# Altium PCB MT7688.PcbDoc (part 1 of 2)
Units mm, origin at the board's own origin, x right, y up, seen from the top; angles counter-clockwise.
Board outline 88.82 x 86.16 mm, 4 copper layers (Top Layer, GND, Layer 3, Bottom Layer), stack 0.603 mm thick; 138 components, 120 nets, 535 pads, 66 vias.
Unrouted connection lines stored in the file: 288.
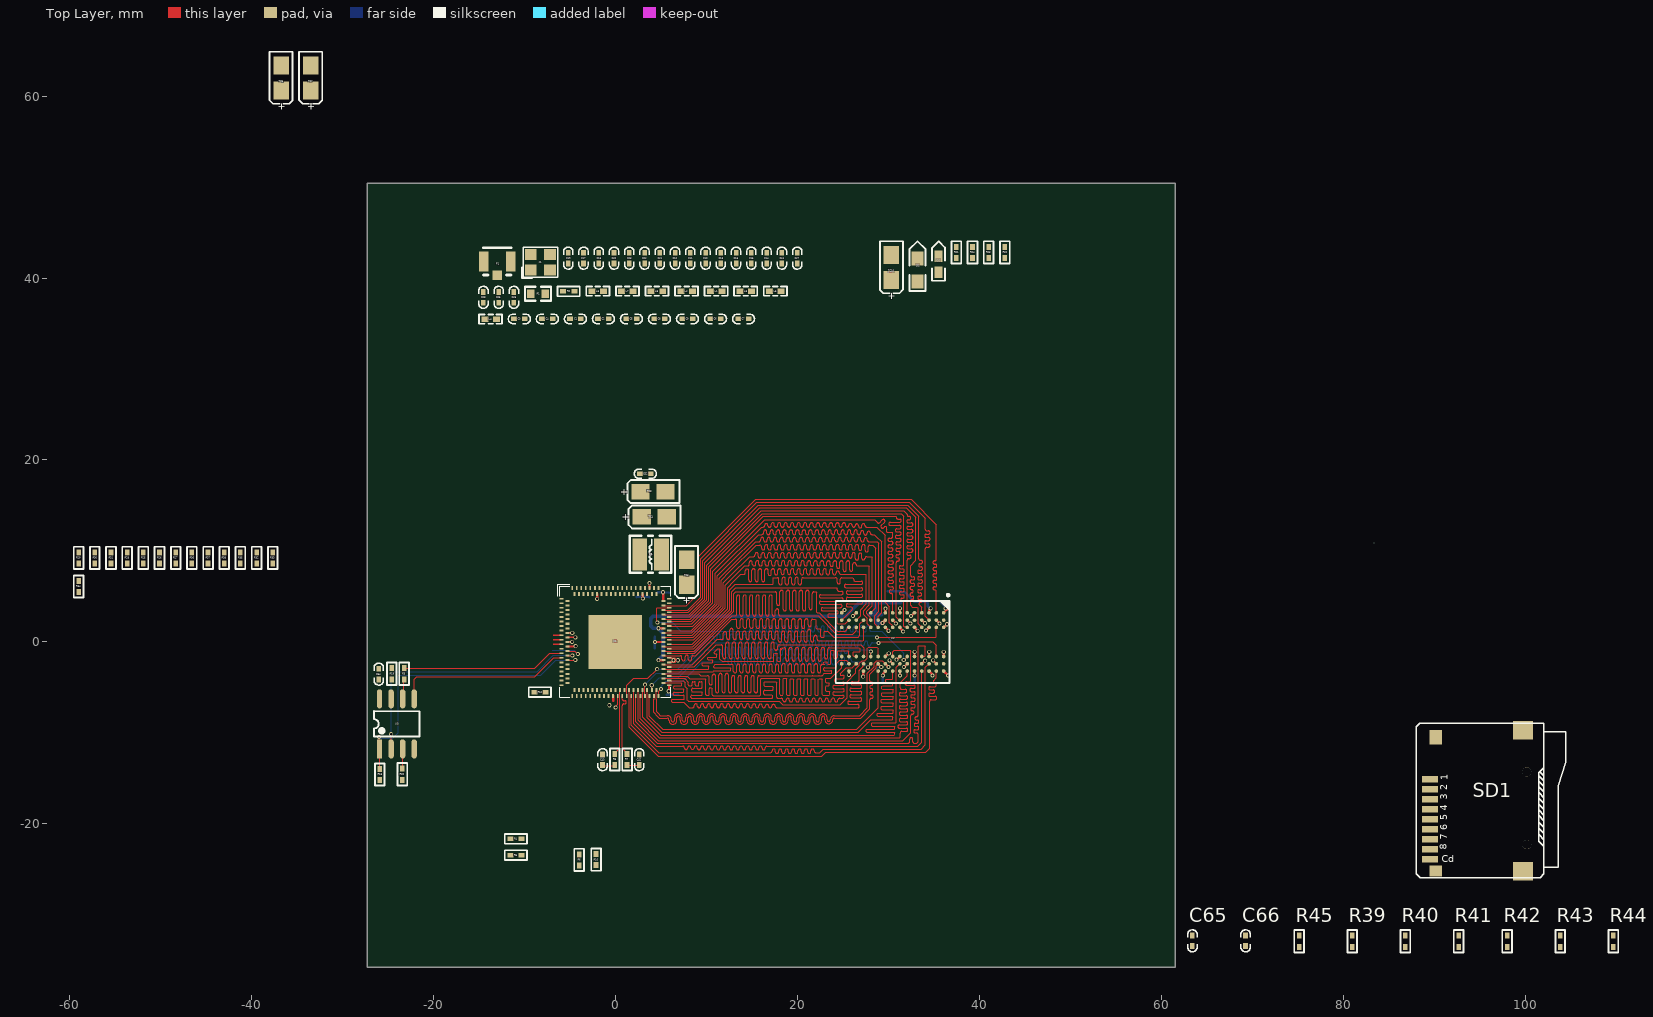
[diagram p0: Top Layer view]
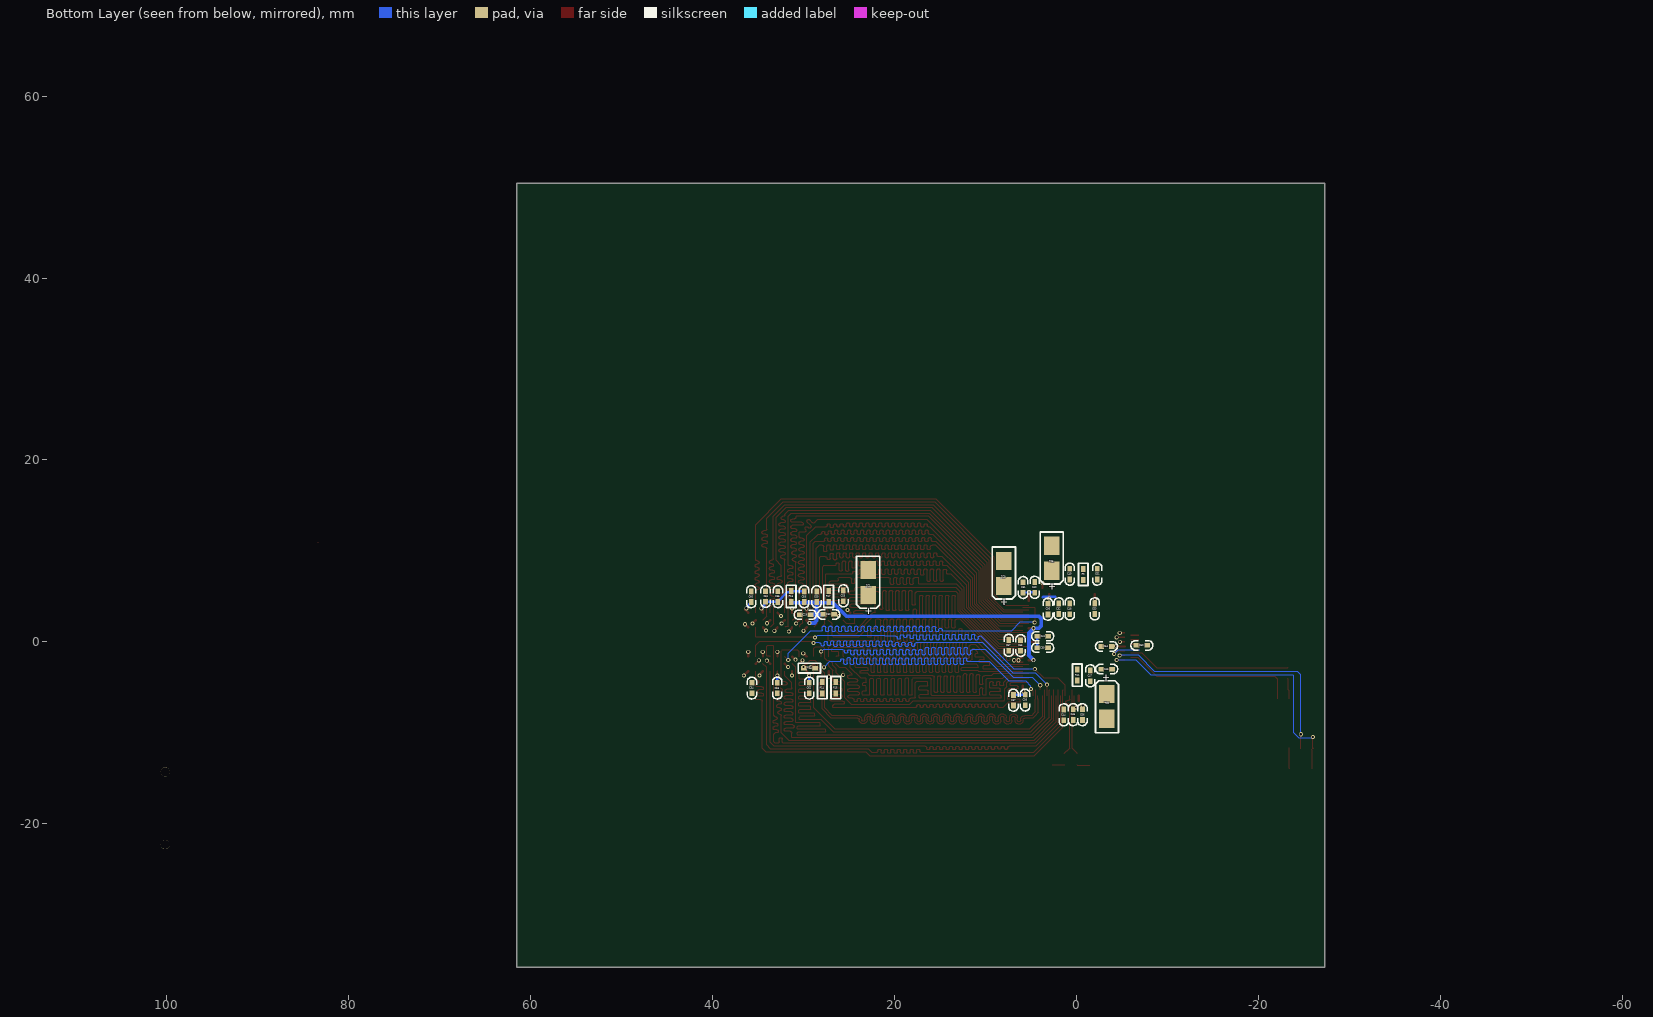
[diagram p1: Bottom Layer view, seen from below]
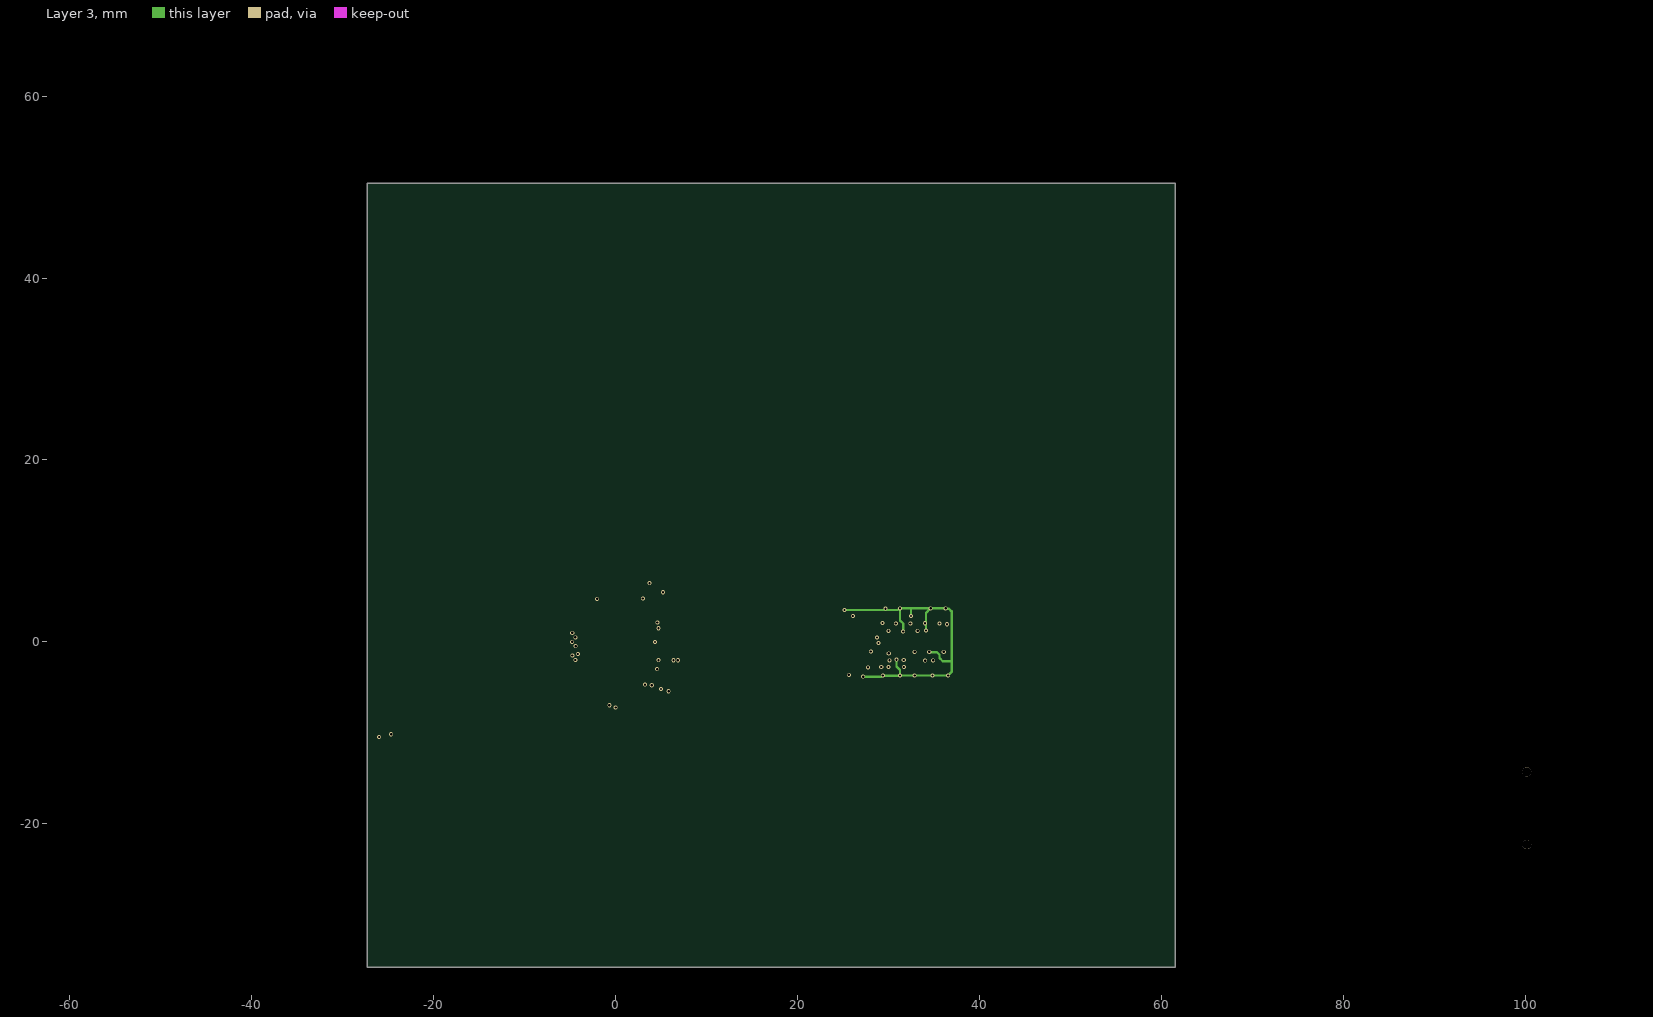
[diagram p2: Layer 3]

## Layer stack, top to bottom
Top Solder: solder mask 0.0102, Solder Resist, Dk 3.5
Top Layer: signal copper 0.0356
Dielectric 2: prepreg 0.0711, PP-006, Dk 4.1
GND: signal copper 0.035
Dielectric 1: dielectric 0.32, FR-4, Dk 4.8
Layer 3: signal copper 0.035
Power: prepreg 0.0711, PP-006, Dk 4.1
Bottom Layer: signal copper 0.0356
Bottom Solder: solder mask 0.0102, Solder Resist, Dk 3.5

## Board outline
-27.254,-35.747 -27.254,50.416 61.565,50.416 61.565,-35.747

## Design rules (kind name [scope] priority, off if disabled: settings)
Clearance DDR2 [InNetClass('DDR')] p1: gap=0.102 ignorepadtopadclearanceinfootprint=FALSE except(0.203: Arc-Arc Arc-Track Track-Track)
Clearance [All] p2: gap=0.152 ignorepadtopadclearanceinfootprint=FALSE except(0.102: Arc-SMDPad Track-SMDPad)
DiffPairsRouting [All] p1: maxlimit=0.406 minlimit=0.152 mostfreqgap=0.152 toplayer_minwidth=0.102 toplayer_maxwidth=0.203 toplayer_prefwidth=0.203 midlayer1_minwidth=0.102 midlayer1_maxwidth=0.203 midlayer1_prefwidth=0.203 midlayer2_minwidth=0.102 midlayer2_maxwidth=0.203 midlayer2_prefwidth=0.203 bottomlayer_minwidth=0.102 bottomlayer_maxwidth=0.203 bottomlayer_prefwidth=0.203 maxuncoupledlength=12.7
PolygonConnect [All] p1: connectstyle=Relief reliefconductorwidth=0.254 reliefentries=4 polygonreliefangle="90 Angle" airgapwidth=0.254
RoutingVias [All] p1: holewidth=0.25 width=0.45 viastyle="Through Hole" minholewidth=0.25 minwidth=0.45 maxholewidth=0.25 maxwidth=0.65
SilkToSolderMaskClearance [IsPad] p1: minsilkscreentomaskgap=0.025 clearancetoexposedcopper=TRUE
SolderMaskExpansion [IsVia] p1: expansion=0.102 istentingtop=TRUE
Width [All] p1: maxlimit=1 minlimit=0.102 preferedwidth=0.152
28 further rules are at their usual default settings.

## Classes and differential pairs
net class DDR: DDR_CASN DDR_CSN DDR_MBA0 DDR_MBA1 DDR_MBA2 DDR_MCKE DDR_MDQM0 DDR_MDQM1 DDR_MDQS0 DDR_MDQS1 DDR_MODT DDR_RASN DDR_VREF DDR_WEN MADDR0 MADDR1 MADDR2 MADDR3 MADDR4 MADDR5 MADDR6 MADDR7 MADDR8 MADDR9 MADDR10 MADDR11 MADDR12 MADDR13 MDATA0 MDATA1 MDATA2 MDATA3 MDATA4 MDATA5 MDATA6 MDATA7 MDATA8 MDATA9 MDATA10 MDATA11 MDATA12 MDATA13 MDATA14 MDATA15
component class Flash: C64 R18 R19 R20 U3
component class Designator: R25 R26 R27 R28 R29 R30 R31 R32 R33 R34 R35 R36 R37 R38
component class DDR: C58 C59 C60 C61 C62 C63 R13 R14 R15 R16 R17 TC9 U2
differential pair USB_D: +USB_D_P -USB_D_N
differential pair TXO1: +TXO1_P -TXO1_N
differential pair TXO0: +TXO0_P -TXO0_N
differential pair RXI1: +RXI1_P -RXI1_N
differential pair RXI0: +RXI0_P -RXI0_N
differential pair CLK: +CLK_P -CLK_N

## Components (designator, comment, footprint, x,y, rotation, side; value= is the part's Value field where it differs from the comment)
C1 "CAP" 0402C -5.025,35.502 r0 top
C2 "CAP" 0402C -1.946,35.502 r0 top
C3 "CAP" 0402C -11.184,35.502 r0 top
C4 "CAP" 0402C -8.105,35.502 r0 top
C5 "CAP" 0402C 1.134,35.502 r0 top
C6 "CAP" 0402C 10.373,35.502 r0 top
C7 "CAP" 0402C 13.452,35.502 r0 top
C8 "CAP" 0402C 4.213,35.502 r0 top
C9 "CAP" 0402C 7.293,35.502 r0 top
C10 "CAP" 0402C 9.92,41.558 r90 top
C11 "CAP" 0402C 8.243,41.558 r90 top
C12 "CAP" 0402C 6.566,41.558 r90 top
C13 "CAP" 0402C 11.596,41.558 r90 top
C14 "CAP" 0402C 16.626,41.558 r90 top
C15 "CAP" 0402C 14.95,41.558 r90 top
C16 "CAP" 0402C 13.273,41.558 r90 top
C17 "CAP" 0402C -3.494,41.558 r90 top
C18 "CAP" 0402C -1.817,41.558 r90 top
C19 "CAP" 0402C -5.171,41.558 r90 top
C20 "CAP" 0402C -0.141,41.558 r90 top
C21 "CAP" 0402C 4.889,41.558 r90 top
C22 "CAP" 0402C 3.213,41.558 r90 top
C23 "CAP" 0402C 1.536,41.558 r90 top
C24 "CAP" 0402C 18.303,41.558 r90 top
C25 "CAP" 0402C -12.825,37.246 r90 top
C26 "CAP" 0402C -11.149,37.246 r90 top
C27 "CAP" 0402C 19.98,41.558 r90 top
C28 "CAP" 0402C -14.502,37.246 r90 top
C29 "CAP" 0402C 29.2,2.99 r0 bottom
C30 "CAP" 0402C 27.888,3.021 r180 bottom
C31 "CAP" 0402C 5.885,5.349 r90 bottom
C32 "CAP" 0402C 1.958,4.284 r270 bottom
C33 "CAP" 0402C 25.632,4.423 r90 bottom
C34 "CAP" 0402C 35.691,-4.432 r270 bottom
C35 "CAP" 0402C 32.837,4.343 r90 bottom
C36 "CAP" 0402C 3.155,4.238 r270 bottom
C37 "CAP" 0402C 6.948,-5.77 r270 bottom
C38 "CAP" 0402C 5.672,-5.751 r270 bottom
C39 "CAP" 0402C 4.368,-0.645 r180 bottom
C40 "CAP" 0402C 4.611,5.368 r90 bottom
C41 "CAP" 0402C 4.364,0.639 r180 bottom
C42 "CAP" 0402C 2.614,-13.576 r90 top
C43 "CAP" 0402C -1.406,-13.58 r90 top
C44 "CAP" 0402C 1.409,-7.376 r270 bottom
C45 "CAP" 0402C 0.389,-7.356 r270 bottom
C46 "CAP" 0402C -3.936,-2.979 r0 bottom
C47 "CAP" 0402C -1.503,-4.368 r90 bottom
C48 "CAP" 0402C 0.757,4.267 r270 bottom
C49 "CAP" 0402C 0.753,6.817 r90 bottom
C50 "0.1uF/16V" 0402C -6.538,-0.379 r180 bottom
C51 "0.1uF/16V" 0402C -2.262,6.821 r90 bottom
C52 "0.1uF/16V" 0402C 2.659,18.491 r0 top
C53 "15pF/50V" 0402C -1.998,3.011 r90 bottom
C54 "15pF/50V" 0402C -3.914,-0.499 r0 bottom
C55 "0.1uF/16V" 0402C 6.161,-1.03 r90 bottom
C56 "0.1uF/16V" 0402C -0.635,-7.352 r270 bottom
C57 "0.1uF/16V" 0402C 7.46,-1.015 r90 bottom
C58 "0.1uF/16V" 0402C 29.956,5.607 r270 bottom
C59 "0.1uF/16V" 0402C 28.582,4.337 r90 bottom
C60 "0.1uF/16V" 0402C 35.778,4.337 r90 bottom
C61 "0.1uF/16V" 0402C 34.189,4.361 r90 bottom
C62 "0.1uF/16V" 0402C 29.39,-4.432 r270 bottom
C63 "0.1uF/16V" 0402C 32.921,-4.432 r270 bottom
C64 "0.1uF/16V" 0402C -26.001,-4.166 r90 top
C65 "10uF" 0402C 63.433,-33.485 r90 top
C66 "100nF" 0402C 69.273,-33.485 r90 top
D1 "LED" LED-0805B 33.211,39.602 r90 top
D2 "LED" LED-0603B 35.529,40.618 r90 top
L1 "INDUCTOR" 0402L 10.442,38.557 r0 top
L2 "INDUCTOR" 0402L 7.19,38.557 r0 top
L3 "INDUCTOR" 0402L 13.693,38.557 r0 top
L4 "INDUCTOR" 0402L -14.35,35.477 r0 top
L5 "INDUCTOR" 0402L 16.944,38.557 r0 top
L6 "INDUCTOR" 0402L -2.563,38.557 r0 top
L7 "INDUCTOR" 0402L 0.688,38.557 r0 top
L8 "INDUCTOR" 0402L 3.939,38.557 r0 top
L9 "INDUCTOR" CD31 3.872,9.624 r180 top
P1 "50OHM" IPEX -14.46,41.826 r0 top
R1 "RES" 0603R -9.294,38.277 r0 top
R2 "RES" 0402R -5.738,38.531 r0 top
R3 "RES" 0402R -23.224,-2.887 r270 top
R4 "RES" 0402R -11.542,-21.65 r0 top
R5 "RES" 0402R -11.542,-23.428 r0 top
R6 "RES" 0402R -3.979,-24.567 r90 top
R7 "RES" 0402R 1.281,-13.527 r90 top
R8 "RES" 0402R -0.065,-13.525 r90 top
R9 "RES" 0402R -0.735,8.035 r270 bottom
R10 "RES" 0402R -2.125,-24.544 r90 top
R11 "RES" 0402R -0.066,-3.04 r270 bottom
R12 "RES" 0402R -8.907,-5.518 r0 top
R13 "RES" 0402R 29.985,-2.871 r180 bottom
R14 "RES" 0402R 27.967,-5.642 r90 bottom
R15 "RES" 0402R 26.469,-4.423 r270 bottom
R16 "RES" 0402R 31.382,5.616 r270 bottom
R17 "RES" 0402R 27.258,4.397 r90 bottom
R18 "RES" 0402R -25.904,-15.175 r90 top
R19 "RES" 0402R -24.587,-2.887 r270 top
R20 "RES" 0402R -23.41,-13.933 r270 top
R21 "RES" 0402R 37.478,42.219 r90 top
R22 "RES" 0402R 42.812,42.219 r90 top
R23 "RES" 0402R 41.034,42.219 r90 top
R24 "RES" 0402R 39.256,42.219 r90 top
R25 "RES" 0402R -51.886,8.637 r90 top
R26 "RES" 0402R -50.108,8.637 r90 top
R27 "RES" 0402R -48.33,8.637 r90 top
R28 "RES" 0402R -53.664,8.637 r90 top
R29 "RES" 0402R -58.998,8.637 r90 top
R30 "RES" 0402R -57.22,8.637 r90 top
R31 "RES" 0402R -55.442,8.637 r90 top
R32 "RES" 0402R -39.44,8.637 r90 top
R33 "RES" 0402R -37.662,8.637 r90 top
R34 "RES" 0402R -58.998,5.488 r90 top
R35 "RES" 0402R -41.218,8.637 r90 top
R36 "RES" 0402R -46.552,8.637 r90 top
R37 "RES" 0402R -44.774,8.637 r90 top
R38 "RES" 0402R -42.996,8.637 r90 top
R39 "10K" 0402R 81.006,-33.51 r90 top
R40 "10K" 0402R 86.845,-33.51 r90 top
R41 "10K" 0402R 92.686,-33.51 r90 top
R42 "10K" 0402R 98.02,-33.51 r90 top
R43 "10K" 0402R 103.86,-33.51 r90 top
R44 "10K" 0402R 109.7,-33.51 r90 top
R45 "22R" 0402R 75.165,-33.51 r90 top
SD1 "MicroSD" "Micro SD" 99.778,-25.186 r90 top
TC1 "TCAP" TAJ-A/3216 22.911,5.1 r90 bottom
TC2 "TCAP" TAJ-A/3216 -3.327,-5.659 r270 bottom
TC3 "2.2uF/6.3V" TAJ-A/3216 7.822,6.243 r90 top
TC4 "10uF/6.3V" TAJ-A/3216 2.855,13.74 r0 top
TC5 "10uF/6.3V" TAJ-A/3216 2.734,7.783 r90 bottom
TC6 "2.2uF/6.3V" TAJ-A/3216 -36.745,60.553 r90 top
TC7 "4.7uF/6.3V" TAJ-A/3216 -33.497,60.553 r90 top
TC8 "4.7uF/6.3V" TAJ-A/3216 2.722,16.529 r0 top
TC9 "4.7uF/6.3V" TAJ-A/3216 8.004,6.107 r90 bottom
TC10 "4.7uF/6.3V" TAJ-A/3216 30.343,39.731 r90 top
U1 "MT7688AN" MT7628AN$2F$DRQFN156$2F$SMD$2F$P0.5$2F$12X12 0,0 r270 top locked
U2 "DDR2_W9751G6KB" MICT-RT-84 30.48,0 r270 top locked
U3 "W25Q128" SOP8 -25.926,-11.756 r90 top locked
X1 "XTAL-4P" "OSC 3225-4P" -8.243,41.752 r0 top

## Footprints (in the part's own frame and the unit in brackets; to place one, negate y for a bottom-side part, rotate by r counter-clockwise, add the part's x,y. Pads: shape width x height; smd on the part's side, far side on the other; paste and mask are expansions set on the pad)
0402C [mil]
  rect 25x20 smd: 1(2,0.16) 2(48,0.16)
  silkscreen extent -23,-20 73,20, body extent 5,-12 45,12, height 8
0402L [mil]
  rect 30x25 smd: 1(0,0) 2(50,0)
  silkscreen extent -25,-20 75,20, body extent 5,-10 45,10, height 20
0402R [mil]
  rect 26x20 smd: 1(0,0) 2(48,0)
  silkscreen extent -24,-21 72,21, body extent 4,-10 43,10, height 13
0603R [mm]
  rect 0.8x0.965 smd: 1(0,0) 2(1.6,0)
  silkscreen extent -0.64,-0.76 2.21,0.76, body extent -0.04,-0.41 1.56,0.41, height 0.45
CD31 [mm] "3.5*3*1mm（长宽高）"
  rect 1.6x3.5 smd: 1(-1.2,0) 2(1.2,0)
  silkscreen extent -2.29,-2.03 2.29,2.03, body extent -1.72,-1.48 1.72,1.52, height 1.2
IPEX [mm]
  rect 1.05x2.2 smd: 1(0,0) 3(2.95,0)
  rect 1x1.05 smd: 2(1.475,-1.525)
  silkscreen extent -0.02,-1.5 2.98,1.5, body extent 0.02,-1.55 3.02,1.55, height 1.25
LED-0603B [mil]
  rect 50x35 smd: A(0,0.26) K(70,0.26)
  silkscreen extent -36,-28 135,28, body extent 4,-15 66,17, height 24
LED-0805B [mil]
  rect 60x50 smd: A(0,0) K(100,0)
  silkscreen extent -40,-35 175,35, body extent 10,-25 89,25, height 32
"Micro SD" [mm]
  rect 2.032x2.2 smd: 0(0,0) 0(15.5,0)
  rect 1.2x1.4 smd: 0(0,9.6)
  round 1 hole 1 unplated: 0(2.9,-0.4) 0(10.9,-0.4)
  rect 1.6x1.4 smd: 0(14.7,9.6)
  rect 0.7x1.8 smd: 1(10.1,10.227) 2(9,10.227) 3(7.9,10.227) 4(6.8,10.227) 5(5.7,10.227) 6(4.6,10.227) 7(3.5,10.227) 8(2.4,10.227) 9(1.3,10.227)
  Top Layer lines w0.03: 36.064,16.423 36.114,16.373
  silkscreen extent -0.72,-4.68 16.27,11.75, body extent -0.27,-4.63 16,10.57, height 1.8
MICT-RT-84 [mm] "BGA, 84-Balls, Body 12.5x9mm, Pitch 0.8mm"
  round 0.4 smd: A1(-3.2,5.6) A2(-2.4,5.6) A3(-1.6,5.6) A7(1.6,5.6) A8(2.4,5.6) A9(3.2,5.6) B1(-3.2,4.8) B2(-2.4,4.8) B3(-1.6,4.8) B7(1.6,4.8) B8(2.4,4.8) B9(3.2,4.8) C1(-3.2,4) C2(-2.4,4) C3(-1.6,4) C7(1.6,4) C8(2.4,4) C9(3.2,4) D1(-3.2,3.2) D2(-2.4,3.2) D3(-1.6,3.2) D7(1.6,3.2) D8(2.4,3.2) D9(3.2,3.2) E1(-3.2,2.4) E2(-2.4,2.4) E3(-1.6,2.4) E7(1.6,2.4) E8(2.4,2.4) E9(3.2,2.4) F1(-3.2,1.6) F2(-2.4,1.6) F3(-1.6,1.6) F7(1.6,1.6) F8(2.4,1.6) F9(3.2,1.6) G1(-3.2,0.8) G2(-2.4,0.8) G3(-1.6,0.8) G7(1.6,0.8) G8(2.4,0.8) G9(3.2,0.8) H1(-3.2,0) H2(-2.4,0) H3(-1.6,0) H7(1.6,0) H8(2.4,0) H9(3.2,0) J1(-3.2,-0.8) J2(-2.4,-0.8) J3(-1.6,-0.8) J7(1.6,-0.8) J8(2.4,-0.8) J9(3.2,-0.8) K2(-2.4,-1.6) K3(-1.6,-1.6) K7(1.6,-1.6) K8(2.4,-1.6) K9(3.2,-1.6) L1(-3.2,-2.4) L2(-2.4,-2.4) L3(-1.6,-2.4) L7(1.6,-2.4) L8(2.4,-2.4) M2(-2.4,-3.2) M3(-1.6,-3.2) M7(1.6,-3.2) M8(2.4,-3.2) M9(3.2,-3.2) N1(-3.2,-4) N2(-2.4,-4) N3(-1.6,-4) N7(1.6,-4) N8(2.4,-4) P2(-2.4,-4.8) P3(-1.6,-4.8) P7(1.6,-4.8) P8(2.4,-4.8) P9(3.2,-4.8) R1(-3.2,-5.6) R2(-2.4,-5.6) R3(-1.6,-5.6) R7(1.6,-5.6) R8(2.4,-5.6)
  silkscreen extent -5.27,-6.25 4.5,6.25, body extent -4.5,-6.25 4.5,6.25, height 1.2
MT7628AN$2F$DRQFN156$2F$SMD$2F$P0.5$2F$12X12 [mm]
  rect 0.19x0.45 smd: 1(-4.75,-5.925) 3(-4.25,-5.925) 5(-3.75,-5.925) 7(-3.25,-5.925) 9(-2.75,-5.925) 11(-2.25,-5.925) 13(-1.75,-5.925) 15(-1.25,-5.925) 17(-0.75,-5.925) 19(-0.25,-5.925) 21(0.25,-5.925) 23(0.75,-5.925) 25(1.25,-5.925) 27(1.75,-5.925) 29(2.25,-5.925) 31(2.75,-5.925) 33(3.25,-5.925) 35(3.75,-5.925) 37(4.25,-5.925) 39(4.75,-5.925) 79(4.75,5.925) 81(4.25,5.925) 83(3.75,5.925) 85(3.25,5.925) 87(2.75,5.925) 89(2.25,5.925) 91(1.75,5.925) 93(1.25,5.925) 95(0.75,5.925) 97(0.25,5.925) 99(-0.25,5.925) 101(-0.75,5.925) 103(-1.25,5.925) 105(-1.75,5.925) 107(-2.25,5.925) 109(-2.75,5.925) 111(-3.25,5.925) 113(-3.75,5.925) 115(-4.25,5.925) 117(-4.75,5.925)
  rect 0.22x0.45 smd: 2(-4.5,-5.275) 4(-4,-5.275) 6(-3.5,-5.275) 8(-3,-5.275) 10(-2.5,-5.275) 12(-2,-5.275) 14(-1.5,-5.275) 16(-1,-5.275) 18(-0.5,-5.275) 20(0,-5.275) 22(0.5,-5.275) 24(1,-5.275) 26(1.5,-5.275) 28(2,-5.275) 30(2.5,-5.275) 32(3,-5.275) 34(3.5,-5.275) 36(4,-5.275) 38(4.5,-5.275) 80(4.5,5.275) 82(4,5.275) 84(3.5,5.275) 86(3,5.275) 88(2.5,5.275) 90(2,5.275) 92(1.5,5.275) 94(1,5.275) 96(0.5,5.275) 98(0,5.275) 100(-0.5,5.275) 102(-1,5.275) 104(-1.5,5.275) 106(-2,5.275) 108(-2.5,5.275) 110(-3,5.275) 112(-3.5,5.275) 114(-4,5.275) 116(-4.5,5.275)
  rect 0.45x0.19 smd: 40(5.925,-4.75) 42(5.925,-4.25) 44(5.925,-3.75) 46(5.925,-3.25) 48(5.925,-2.75) 50(5.925,-2.25) 52(5.925,-1.75) 54(5.925,-1.25) 56(5.925,-0.75) 58(5.925,-0.25) 60(5.925,0.25) 62(5.925,0.75) 64(5.925,1.25) 66(5.925,1.75) 68(5.925,2.25) 70(5.925,2.75) 72(5.925,3.25) 74(5.925,3.75) 76(5.925,4.25) 78(5.925,4.75) 118(-5.925,4.75) 120(-5.925,4.25) 122(-5.925,3.75) 124(-5.925,3.25) 126(-5.925,2.75) 128(-5.925,2.25) 130(-5.925,1.75) 132(-5.925,1.25) 134(-5.925,0.75) 136(-5.925,0.25) 138(-5.925,-0.25) 140(-5.925,-0.75) 142(-5.925,-1.25) 144(-5.925,-1.75) 146(-5.925,-2.25) 148(-5.925,-2.75) 150(-5.925,-3.25) 152(-5.925,-3.75) 154(-5.925,-4.25) 156(-5.925,-4.75)
  rect 0.45x0.22 smd: 41(5.275,-4.5) 43(5.275,-4) 45(5.275,-3.5) 47(5.275,-3) 49(5.275,-2.5) 51(5.275,-2) 53(5.275,-1.5) 55(5.275,-1) 57(5.275,-0.5) 59(5.275,0) 61(5.275,0.5) 63(5.275,1) 65(5.275,1.5) 67(5.275,2) 69(5.275,2.5) 71(5.275,3) 73(5.275,3.5) 75(5.275,4) 77(5.275,4.5) 119(-5.275,4.5) 121(-5.275,4) 123(-5.275,3.5) 125(-5.275,3) 127(-5.275,2.5) 129(-5.275,2) 131(-5.275,1.5) 133(-5.275,1) 135(-5.275,0.5) 137(-5.275,0) 139(-5.275,-0.5) 141(-5.275,-1) 143(-5.275,-1.5) 145(-5.275,-2) 147(-5.275,-2.5) 149(-5.275,-3) 151(-5.275,-3.5) 153(-5.275,-4) 155(-5.275,-4.5)
  rect 5.9x5.9 smd: 157(0,0)
  silkscreen extent -6.35,-6.35 6.1,6.1
"OSC 3225-4P" [mm]
  rect 1.3x1.2 smd: 1(-1.05,-0.85) 2(1.05,-0.85) 3(1.05,0.85) 4(-1.05,0.85)
  silkscreen extent -2.03,-1.75 1.9,1.65, body extent -1.47,-1.27 1.73,1.23, height 0.7
SOP8 [mm]
  rect 2.1x0.6 smd: 1(0,0)
  oval 2.1x0.6 smd: 2(0,-1.27) 3(0,-2.54) 4(0,-3.81) 5(5.5,-3.81) 6(5.5,-2.54) 7(5.5,-1.27) 8(5.5,0)
  silkscreen extent 1.35,-4.41 4.15,0.6, body extent -0.36,-4.37 5.64,0.63, height 1.9
TAJ-A/3216 [mm]
  rect 2x1.7 smd: 1(0.047,0) 2(2.794,0)
  silkscreen extent -1.4,-1.27 4.32,1.27, body extent -0.2,-0.8 3,0.8, height 1.6

## Part data
C1 C2 C3 C4 C5 C6 C7 C8 C9 C10 C11 C12 C13 C14 C15 C16 C17 C18 C19 C20 C21 C22 C23 C24 C25 C26 C27 C28 C29 C30 C31 C32 C33 C34 C35 C36 C37 C38 C39 C40 C41 C42 C43 C44 C45 C46 C47 C48 C49: "无极性电容"
C50 C51 C52 C53 C54 C55 C56 C57 C58 C59 C60 C61 C62 C63 C64 C65 C66: library part CAP, "无极性电容"
P1: library part IPEX, "RF Coaxial PCB Connector, MCX; Thru-Hole, Right-Angle Mount Socket, Blunt Post Terminal, 50 Ohm Impedance", PackageDocument=04-Jul-1999, ComponentLink1Description="Manufacturer Link", ComponentLink1URL=http://www.amphenolrf.com/, DatasheetDocument=30-May-2003, DrillSize="Corresponds to nominal value.", LatestRevisionDate=15-Jul-2004, LatestRevisionNote="Component Replaced.", PackageReference=919-119J-51AX, PCB_Layout="Complies with manufacturer's recommendation.", Published=15-Jul-2004, Publisher="Altium Limited"
R39 R40 R41 R42 R43 R44 R45: library part RES
TC1 TC2: "钽电容"
TC3 TC4 TC5 TC6 TC7 TC8 TC9 TC10: library part TCAP, "钽电容"
X1: "4脚无源晶振"

## Via types
v1: diameter 0.45, hole 0.25, Top Layer to Bottom Layer, tented both sides, 66 vias

## Nets (pads, with @x,y where several pads share a name; then routed paths per layer and width w, separated by ;. In a path a pad name is that pad's centre, name@x,y a point inside that pad or via, vN(x,y) a via of type N, cw(c..) or ccw(c..) an arc to the next point about the centre after c; other vN are vias at no path point)
3.3V_RF: C4.1 C5.2 C6.2 C7.2 C8.2 C9.2 C21.2 C22.2 C24.1 C25.1 C26.1 C27.1 L1.2 L2.2 R1.2 R2.1 U1.8 U1.14 U1.15 U1.149 U1.150 U1.155
3.3VD: C1.2 C2.2 C3.2 C44.1 C45.1 C46.1 C47.1 C49.1 C50.1 C51.1 C64.1 C65.1 C66.1 R1.1 R4.2 R5.2 R18.1 R19.1 R20.2 R21.1 R23.2 R24.2 R25.1 R27.1 R29.1 R30.1 R33.1 R35.1 R37.1 R39.1 R40.1 R41.1 R42.1 R43.1 R44.1 SD1.4 TC2.1 TC3.1 TC5.1 U1.23 U1.32 U1.38 U1.41 U1.53 U1.60 U1.117 U1.123 U1.124 U1.134 U1.146 U3.8 | length 1.4
  Top Layer w0.102: v1(0.033,-7.216) 0.033,-7.087 0.25,-6.87 U1.60@0.25,-5.925
CLK: R3.2 R27.2 R28.2 U3.6 | length 2.3
  Top Layer w0.102: U3.6@-23.386,-6.256 -23.386,-5.371 -23.255,-5.24 -23.255,-4.1 R3.2@-23.224,-4.069
CLK_N: R13.2 U1.76 U2.K8 | length 51.8
  Top Layer w0.102: U1.76@4.25,-5.925 4.25,-6.273 4.221,-6.301 4.221,-7.75 4.616,-8.144 4.833,-8.361 5.713,-8.361 cw(c5.713,-8.539) 5.89,-8.539 5.89,-8.604 ccw(c6.324,-8.604) 6.759,-8.604 6.759,-8.339 cw(c6.936,-8.339) 7.114,-8.339 7.114,-8.604 ccw(c7.548,-8.604) 7.982,-8.604 7.982,-8.339 cw(c8.16,-8.339) 8.338,-8.339 8.338,-8.604 ccw(c8.772,-8.604) 9.206,-8.604 9.206,-8.339 cw(c9.384,-8.339) 9.562,-8.339 9.562,-8.604 ccw(c9.996,-8.604) 10.43,-8.604 10.43,-8.339 cw(c10.608,-8.339) 10.786,-8.339 10.786,-8.604 ccw(c11.22,-8.604) 11.654,-8.604 11.654,-8.339 cw(c11.832,-8.339) 12.009,-8.339 12.009,-8.604 ccw(c12.443,-8.604) 12.878,-8.604 12.878,-8.339 cw(c13.055,-8.339) 13.233,-8.339 13.233,-8.604 ccw(c13.667,-8.604) 14.101,-8.604 14.101,-8.339 cw(c14.279,-8.339) 14.457,-8.339 14.457,-8.604 ccw(c14.891,-8.604) 15.325,-8.604 15.325,-8.339 cw(c15.503,-8.339) 15.681,-8.339 15.681,-8.604 ccw(c16.115,-8.604) 16.549,-8.604 16.549,-8.339 cw(c16.727,-8.339) 16.905,-8.339 16.905,-8.604 ccw(c17.339,-8.604) 17.773,-8.604 17.773,-8.339 cw(c17.951,-8.339) 18.128,-8.339 18.128,-8.604 ccw(c18.562,-8.604) 18.997,-8.604 18.997,-8.339 cw(c19.174,-8.339) 19.352,-8.339 19.352,-8.604 ccw(c19.786,-8.604) 20.22,-8.604 20.22,-8.339 cw(c20.398,-8.339) 20.576,-8.339 20.576,-8.604 ccw(c21.01,-8.604) 21.444,-8.604 21.444,-8.339 cw(c21.622,-8.339) 21.8,-8.339 21.8,-8.604 ccw(c22.234,-8.604) 22.668,-8.604 22.668,-8.339 cw(c22.846,-8.339) 23.024,-8.339 23.024,-8.553 ccw(c23.458,-8.553) 23.892,-8.553 23.892,-8.539 cw(c24.07,-8.539) 24.07,-8.361 26.246,-8.361 26.478,-8.361 26.963,-8.361 27.96,-7.364 27.96,-6.785 27.96,-6.379 cw(c28.138,-6.379) 28.138,-6.201 28.161,-6.201 ccw(c28.161,-6.023) 28.161,-5.846 28.136,-5.846 cw(c28.136,-5.668) 28.136,-5.49 ccw(c28.136,-5.312) 28.136,-5.134 cw(c28.136,-4.957) 28.136,-4.779 28.138,-4.779 ccw(c28.138,-4.601) 28.138,-4.423 cw(c28.138,-4.245) 27.96,-4.245 27.96,-3.553 28.235,-3.278 28.689,-2.824 28.689,-2.609 28.88,-2.417 U2.K8@28.88,-2.4
  Top Layer w0.254: U2.K8@28.88,-2.417 v1(29.225,-2.763)
  Bottom Layer w0.102: R13.2@28.765,-2.871 28.874,-2.763 v1(29.225,-2.763)
CLK_P: R13.1 U1.77 U2.J8 | length 51.3
  Top Layer w0.102: U1.77@4.5,-5.275 4.5,-6.273 4.526,-6.299 4.526,-7.692 4.688,-7.854 4.939,-8.105 5.713,-8.105 cw(c5.713,-8.539) 6.147,-8.539 6.147,-8.604 ccw(c6.324,-8.604) 6.502,-8.604 6.502,-8.339 cw(c6.936,-8.339) 7.37,-8.339 7.37,-8.604 ccw(c7.548,-8.604) 7.726,-8.604 7.726,-8.339 cw(c8.16,-8.339) 8.594,-8.339 8.594,-8.604 ccw(c8.772,-8.604) 8.95,-8.604 8.95,-8.339 cw(c9.384,-8.339) 9.818,-8.339 9.818,-8.604 ccw(c9.996,-8.604) 10.174,-8.604 10.174,-8.339 cw(c10.608,-8.339) 11.042,-8.339 11.042,-8.604 ccw(c11.22,-8.604) 11.397,-8.604 11.397,-8.339 cw(c11.832,-8.339) 12.266,-8.339 12.266,-8.604 ccw(c12.443,-8.604) 12.621,-8.604 12.621,-8.339 cw(c13.055,-8.339) 13.489,-8.339 13.489,-8.604 ccw(c13.667,-8.604) 13.845,-8.604 13.845,-8.339 cw(c14.279,-8.339) 14.713,-8.339 14.713,-8.604 ccw(c14.891,-8.604) 15.069,-8.604 15.069,-8.339 cw(c15.503,-8.339) 15.937,-8.339 15.937,-8.604 ccw(c16.115,-8.604) 16.293,-8.604 16.293,-8.339 cw(c16.727,-8.339) 17.161,-8.339 17.161,-8.604 ccw(c17.339,-8.604) 17.516,-8.604 17.516,-8.339 cw(c17.951,-8.339) 18.385,-8.339 18.385,-8.604 ccw(c18.562,-8.604) 18.74,-8.604 18.74,-8.339 cw(c19.174,-8.339) 19.608,-8.339 19.608,-8.604 ccw(c19.786,-8.604) 19.964,-8.604 19.964,-8.339 cw(c20.398,-8.339) 20.832,-8.339 20.832,-8.604 ccw(c21.01,-8.604) 21.188,-8.604 21.188,-8.339 cw(c21.622,-8.339) 22.056,-8.339 22.056,-8.604 ccw(c22.234,-8.604) 22.412,-8.604 22.412,-8.339 cw(c22.846,-8.339) 23.28,-8.339 23.28,-8.553 ccw(c23.458,-8.553) 23.635,-8.553 23.635,-8.539 cw(c24.07,-8.539) 24.07,-8.105 26.246,-8.105 26.478,-8.105 26.857,-8.105 27.704,-7.258 27.704,-3.447 28.432,-2.718 28.432,-2.349 28.734,-2.048 29.328,-2.048 U2.J8@29.68,-2.4
  Top Layer w0.254: U2.J8@29.68,-2.4 v1(30.025,-2.745)
CPURST_N: R22.2 U1.138
CS0: R18.2 U1.28 U3.1 | length 33.5
  Top Layer w0.102: v1(-25.961,-10.447) -25.961,-10.461 v1@-25.938,-10.484 ; v1@-25.938,-10.461 v1@-25.938,-10.314 ; U3.1@-25.926,-11.756 U3.1@-25.938,-11.743 ; v1@-25.916,-10.461 v1@-25.938,-10.484 ; R18.2@-25.904,-13.956 -25.904,-11.882 U3.1@-25.866,-11.844 ; U1.28@-5.275,-2 -5.273,-1.998 -4.406,-1.998 v1(-4.403,-1.995) ; U3.1@-25.938,-11.743 -25.994,-11.688 U3.1@-25.938,-11.632 ; U3.1@-25.938,-11.743 U3.1@-25.938,-11.632 ; U3.1@-25.938,-11.632 v1@-25.938,-10.484
  Bottom Layer w0.102: v1(-25.961,-10.447) -25.831,-10.577 -24.471,-10.577 -23.886,-9.992 -23.886,-3.711 -23.827,-3.651 -8.202,-3.651 -6.546,-1.995 v1(-4.403,-1.995)
DDR_1V8: C31.1 C32.1 C33.1 C34.1 C35.1 C36.1 C37.1 C38.1 C39.1 C40.1 C41.1 C58.1 C60.1 C61.1 C62.1 C63.1 R14.1 R16.1 TC1.1 TC6.1 TC7.1 TC9.1 U1.79 U1.98 U1.116 U1.125 U2.A1 U2.A9 U2.C1 U2.C3 U2.C7 U2.C9 U2.E1 U2.E9 U2.G1 U2.G3 U2.G7 U2.G9 U2.J1 U2.J9 U2.M9 U2.R1 | length 64.2
  Top Layer w0.152: U2.E9@32.88,-3.2 32.891,-3.211 v1@32.891,-3.757
  Top Layer w0.254: U1.125@3,5.275 3.017,5.258 3.017,4.776 v1(3.018,4.775) ; v1(4.354,-0.006) 4.36,0 U1.98@5.275,0 ; v1@5.221,5.427 5.249,5.399 5.249,4.517 5.266,4.5 U1.116@5.275,4.5 ; v1(5.857,-5.42) 5.857,-5.367 5.931,-5.293 U1.79@5.931,-4.782 ; U2.R1@24.88,3.2 v1(25.184,3.504) ; v1@27.259,-3.83 27.259,-3.221 U2.M9@27.28,-3.2 ; v1@29.443,-3.476 29.68,-3.24 U2.J9@29.68,-3.2 ; U2.J1@29.681,3.201 v1(29.681,3.655) ; v1@30.935,-1.945 U2.G7@31.28,-1.6 ; v1(31.28,-3.688) U2.G9@31.28,-3.2 ; U2.G3@31.28,1.6 31.28,1.56 31.353,1.487 31.353,1.473 31.637,1.189 v1(31.637,1.141) ; U2.G1@31.28,3.2 31.282,3.202 31.282,3.691 v1(31.284,3.693) ; v1@32.535,2.855 U2.E1@32.88,3.2 ; v1(34.135,1.255) U2.C3@34.48,1.6 ; U2.C9@34.48,-3.2 34.819,-3.539 34.819,-3.662 v1(34.856,-3.699) ; U2.C7@34.48,-1.6 v1@34.48,-1.112 ; U2.C1@34.48,3.2 34.508,3.228 34.508,3.494 ; U2.A9@36.08,-3.2 v1@36.584,-3.704 ; U2.A1@36.08,3.2 v1@36.425,3.545
  Layer 3 w0.254: v1(25.184,3.504) 31.042,3.504 31.231,3.693 v1(31.284,3.693) ; v1(27.239,-3.818) v1@29.223,-3.818 ; v1@29.419,-3.702 31.267,-3.702 v1(31.28,-3.688) ; v1(30.905,-1.945) 30.905,-2.702 31.28,-3.077 v1(31.28,-3.688) ; v1(31.637,1.141) 31.637,2.019 31.284,2.372 v1(31.284,3.693) ; v1(32.505,2.855) 32.505,3.618 32.581,3.693 ; v1(34.135,1.255) 34.135,3.174 v1(34.654,3.693) ; v1(34.501,-1.091) 34.534,-1.124 35.344,-1.124 35.623,-1.402 35.623,-1.765 35.986,-2.129 36.908,-2.129 36.959,-2.078 ; v1(31.28,-3.688) v1(32.902,-3.688) 32.905,-3.686 36.581,-3.686 v1(36.584,-3.688) 36.959,-3.313 36.959,-2.078 ; v1(31.284,3.693) 32.581,3.693 ; 32.581,3.693 v1(34.654,3.693) ; v1(34.654,3.693) v1(36.307,3.693) 36.344,3.656 36.664,3.656 36.959,3.361 36.959,-2.078
  Bottom Layer w0.254: 2.315,4.928 2.339,4.951 2.955,4.951 2.956,4.952 3.673,4.952 3.71,4.916 ; C39.1@4.337,-0.711 4.335,-0.709 4.335,-0.025 v1(4.354,-0.006) 4.333,0.015 4.333,0.551 C41.1@4.366,0.584 ; C40.1@4.615,5.419 4.654,5.458 v1(5.238,5.458) ; v1@5.207,5.437 5.215,5.429 5.86,5.429 C31.1@5.889,5.4 ; C38.1@5.646,-5.814 5.65,-5.811 6.935,-5.811 C37.1@6.944,-5.82 ; C62.1@29.387,-4.413 29.396,-4.404 29.396,-3.698 v1(29.406,-3.688) ; C58.1@29.953,5.556 29.983,5.586 31.351,5.586 R16.1@31.382,5.616 ; R16.1@31.431,5.491 31.463,5.459 31.839,5.459 32.841,4.458 C35.1@32.841,4.394 ; C35.1@32.852,4.403 34.185,4.403 C61.1@34.193,4.412 34.32,4.285 34.32,3.94 34.53,3.731 34.616,3.731 v1(34.654,3.693) ; v1(32.902,-3.688) 32.91,-3.696 32.91,-4.406 C63.1@32.917,-4.413 ; C60.1@35.782,4.388 35.782,4.324 36.269,3.837 36.269,3.731 v1(36.307,3.693)
DDR_CASN: U1.75 U2.L7 | length 48.7
  Top Layer w0.102: v1(3.999,-4.765) 4,-4.766 U1.75@4,-5.275 ; U2.L7@28.08,-1.6 U2.L7@28.08,-1.6 28.082,-1.091 v1@28.092,-1.081
  Bottom Layer w0.102: v1(3.999,-4.765) 4.807,-3.957 6.899,-3.957 10.01,-0.846 11.064,-0.846 11.47,-0.846 cw(c11.47,-1.024) 11.648,-1.024 11.648,-1.265 ccw(c11.826,-1.265) 12.004,-1.265 12.004,-0.738 cw(c12.181,-0.738) 12.359,-0.738 12.359,-1.265 ccw(c12.537,-1.265) 12.715,-1.265 12.715,-0.738 cw(c12.893,-0.738) 13.07,-0.738 13.07,-1.265 ccw(c13.248,-1.265) 13.426,-1.265 13.426,-0.738 cw(c13.604,-0.738) 13.782,-0.738 13.782,-1.265 ccw(c13.959,-1.265) 14.137,-1.265 14.137,-0.738 cw(c14.315,-0.738) 14.493,-0.738 14.493,-1.265 ccw(c14.671,-1.265) 14.848,-1.265 14.848,-0.738 cw(c15.026,-0.738) 15.204,-0.738 15.204,-1.265 ccw(c15.382,-1.265) 15.56,-1.265 15.56,-0.738 cw(c15.737,-0.738) 15.915,-0.738 15.915,-1.265 ccw(c16.093,-1.265) 16.271,-1.265 16.271,-0.738 cw(c16.449,-0.738) 16.626,-0.738 16.626,-1.265 ccw(c16.804,-1.265) 16.982,-1.265 16.982,-0.989 cw(c17.16,-0.989) 17.338,-0.989 17.338,-1.265 ccw(c17.515,-1.265) 17.693,-1.265 17.693,-0.989 cw(c17.871,-0.989) 18.049,-0.989 18.049,-1.265 ccw(c18.227,-1.265) 18.404,-1.265 18.404,-0.989 cw(c18.582,-0.989) 18.76,-0.989 18.76,-1.265 ccw(c18.938,-1.265) 19.116,-1.265 19.116,-0.989 cw(c19.293,-0.989) 19.471,-0.989 19.471,-1.265 ccw(c19.649,-1.265) 19.827,-1.265 19.827,-0.989 cw(c20.005,-0.989) 20.182,-0.989 20.182,-1.265 ccw(c20.36,-1.265) 20.538,-1.265 20.538,-0.989 cw(c20.716,-0.989) 20.894,-0.989 20.894,-1.265 ccw(c21.071,-1.265) 21.249,-1.265 21.249,-0.989 cw(c21.427,-0.989) 21.605,-0.989 21.605,-1.265 ccw(c21.783,-1.265) 21.96,-1.265 21.96,-1.024 cw(c22.138,-1.024) 22.316,-1.024 22.316,-1.265 ccw(c22.494,-1.265) 22.672,-1.265 22.672,-1.024 cw(c22.849,-1.024) 23.027,-1.024 23.027,-1.265 ccw(c23.205,-1.265) 23.383,-1.265 23.383,-1.024 cw(c23.561,-1.024) 23.738,-1.024 23.738,-1.265 ccw(c23.916,-1.265) 24.094,-1.265 24.094,-1.024 cw(c24.272,-1.024) 24.45,-1.024 24.45,-1.265 ccw(c24.627,-1.265) 24.805,-1.265 24.805,-1.024 cw(c24.983,-1.024) 25.161,-1.024 25.161,-1.079 ccw(c25.339,-1.079) 25.516,-1.079 25.516,-1.024 cw(c25.694,-1.024) 25.694,-0.846 27.85,-0.846 27.979,-0.975 28.064,-1.06 v1(28.084,-1.06)
DDR_CSN: U1.78 U2.L8 | length 49.6
  Top Layer w0.102: U1.78@4.75,-5.925 4.75,-5.425 v1(5.005,-5.169) ; v1(27.777,-2.791) 27.777,-2.703 U2.L8@28.08,-2.4
  Bottom Layer w0.102: v1(5.005,-5.169) 5.024,-5.151 5.024,-4.858 5.54,-4.342 7.393,-4.342 9.549,-2.186 11.839,-2.186 11.889,-2.186 ccw(c11.889,-2.008) 12.067,-2.008 12.067,-1.922 cw(c12.245,-1.922) 12.423,-1.922 12.423,-2.336 ccw(c12.601,-2.336) 12.778,-2.336 12.778,-1.922 cw(c12.956,-1.922) 13.134,-1.922 13.134,-2.336 ccw(c13.312,-2.336) 13.49,-2.336 13.49,-1.923 cw(c13.667,-1.923) 13.845,-1.923 13.845,-2.336 ccw(c14.023,-2.336) 14.201,-2.336 14.201,-1.923 cw(c14.379,-1.923) 14.556,-1.923 14.556,-2.336 ccw(c14.734,-2.336) 14.912,-2.336 14.912,-1.923 cw(c15.09,-1.923) 15.268,-1.923 15.268,-2.336 ccw(c15.445,-2.336) 15.623,-2.336 15.623,-1.923 cw(c15.801,-1.923) 15.979,-1.923 15.979,-2.336 ccw(c16.157,-2.336) 16.334,-2.336 16.334,-1.923 cw(c16.512,-1.923) 16.69,-1.923 16.69,-2.336 ccw(c16.868,-2.336) 17.046,-2.336 17.046,-1.923 cw(c17.223,-1.923) 17.401,-1.923 17.401,-2.336 ccw(c17.579,-2.336) 17.757,-2.336 17.757,-1.923 cw(c17.935,-1.923) 18.112,-1.923 18.112,-2.336 ccw(c18.29,-2.336) 18.468,-2.336 18.468,-1.923 cw(c18.646,-1.923) 18.824,-1.923 18.824,-2.336 ccw(c19.001,-2.336) 19.179,-2.336 19.179,-1.923 cw(c19.357,-1.923) 19.535,-1.923 19.535,-2.336 ccw(c19.713,-2.336) 19.89,-2.336 19.89,-1.923 cw(c20.068,-1.923) 20.246,-1.923 20.246,-2.336 ccw(c20.424,-2.336) 20.602,-2.336 20.602,-1.923 cw(c20.779,-1.923) 20.957,-1.923 20.957,-2.336 ccw(c21.135,-2.336) 21.313,-2.336 21.313,-1.923 cw(c21.491,-1.923) 21.668,-1.923 21.668,-2.336 ccw(c21.846,-2.336) 22.024,-2.336 22.024,-1.923 cw(c22.202,-1.923) 22.38,-1.923 22.38,-2.336 ccw(c22.557,-2.336) 22.735,-2.336 22.735,-1.923 cw(c22.913,-1.923) 23.091,-1.923 23.091,-2.336 ccw(c23.269,-2.336) 23.446,-2.336 23.446,-1.923 cw(c23.624,-1.923) 23.802,-1.923 23.802,-2.336 ccw(c23.98,-2.336) 24.158,-2.336 24.158,-1.923 cw(c24.335,-1.923) 24.513,-1.923 24.513,-2.336 ccw(c24.691,-2.336) 24.869,-2.336 24.869,-1.875 cw(c25.047,-1.875) 25.224,-1.875 25.224,-2.312 ccw(c25.402,-2.312) 25.58,-2.312 25.58,-2.008 cw(c25.758,-2.008) 25.936,-2.008 ccw(c26.113,-2.008) 26.113,-2.186 26.517,-2.186 27.171,-2.186 v1@27.763,-2.777
DDR_MBA0: U1.100 U2.L2 | length 50.8
  Top Layer w0.102: U1.100@5.275,0.5 6.736,0.5 8.535,0.5 11.874,3.839 11.874,6.494 12.701,7.32 14.764,9.383 15.121,9.383 15.171,9.383 ccw(c15.171,9.561) 15.349,9.561 15.349,9.629 cw(c15.527,9.629) 15.705,9.629 15.705,9.403 ccw(c15.883,9.403) 16.06,9.403 16.06,9.629 cw(c16.238,9.629) 16.416,9.629 16.416,9.403 ccw(c16.594,9.403) 16.772,9.403 16.772,9.629 cw(c16.949,9.629) 17.127,9.629 17.127,9.403 ccw(c17.305,9.403) 17.483,9.403 17.483,9.629 cw(c17.661,9.629) 17.838,9.629 17.838,9.403 ccw(c18.016,9.403) 18.194,9.403 18.194,9.629 cw(c18.372,9.629) 18.55,9.629 18.55,9.403 ccw(c18.727,9.403) 18.905,9.403 18.905,9.629 cw(c19.083,9.629) 19.261,9.629 19.261,9.403 ccw(c19.439,9.403) 19.616,9.403 19.616,9.629 cw(c19.794,9.629) 19.972,9.629 19.972,9.403 ccw(c20.15,9.403) 20.328,9.403 20.328,9.629 cw(c20.505,9.629) 20.683,9.629 20.683,9.403 ccw(c20.861,9.403) 21.039,9.403 21.039,9.629 cw(c21.217,9.629) 21.394,9.629 21.394,9.403 ccw(c21.572,9.403) 21.75,9.403 21.75,9.629 cw(c21.928,9.629) 22.106,9.629 22.106,9.403 ccw(c22.283,9.403) 22.461,9.403 22.461,9.629 cw(c22.639,9.629) 22.817,9.629 22.817,9.402 ccw(c22.995,9.402) 23.172,9.402 23.172,9.629 cw(c23.35,9.629) 23.528,9.629 23.528,9.401 ccw(c23.706,9.401) 23.884,9.401 23.884,9.629 cw(c24.061,9.629) 24.239,9.629 24.239,9.4 ccw(c24.417,9.4) 24.595,9.4 24.595,9.629 cw(c24.773,9.629) 24.95,9.629 24.95,9.399 ccw(c25.128,9.399) 25.306,9.399 25.306,9.629 cw(c25.484,9.629) 25.662,9.629 25.662,9.398 ccw(c25.839,9.398) 26.017,9.398 26.017,9.629 cw(c26.195,9.629) 26.373,9.629 26.373,9.183 ccw(c26.551,9.183) 26.728,9.183 26.728,9.59 cw(c26.906,9.59) 27.084,9.59 27.084,9.205 ccw(c27.262,9.205) 27.44,9.205 cw(c27.617,9.205) 27.617,9.383 28.104,9.383 28.177,9.383 28.237,9.323 28.237,3.978 27.631,3.373 27.631,3.11 28.031,2.711 28.031,2.449 U2.L2@28.08,2.4
DDR_MBA1: U1.99 U2.L3 | length 50.9
  Top Layer w0.102: U1.99@5.828,0.255 8.614,0.255 12.103,3.745 12.103,6.247 12.868,7.012 14.207,8.352 14.489,8.352 14.54,8.352 ccw(c14.54,8.529) 14.718,8.529 14.718,8.728 cw(c14.896,8.728) 15.073,8.728 15.073,8.529 ccw(c15.251,8.529) 15.429,8.529 15.429,8.743 cw(c15.607,8.743) 15.785,8.743 15.785,8.529 ccw(c15.962,8.529) 16.14,8.529 16.14,8.743 cw(c16.318,8.743) 16.496,8.743 16.496,8.529 ccw(c16.674,8.529) 16.851,8.529 16.851,8.743 cw(c17.029,8.743) 17.207,8.743 17.207,8.529 ccw(c17.385,8.529) 17.563,8.529 17.563,8.743 cw(c17.74,8.743) 17.918,8.743 17.918,8.529 ccw(c18.096,8.529) 18.274,8.529 18.274,8.743 cw(c18.452,8.743) 18.629,8.743 18.629,8.529 ccw(c18.807,8.529) 18.985,8.529 18.985,8.743 cw(c19.163,8.743) 19.341,8.743 19.341,8.529 ccw(c19.518,8.529) 19.696,8.529 19.696,8.743 cw(c19.874,8.743) 20.052,8.743 20.052,8.529 ccw(c20.23,8.529) 20.407,8.529 20.407,8.743 cw(c20.585,8.743) 20.763,8.743 20.763,8.529 ccw(c20.941,8.529) 21.119,8.529 21.119,8.743 cw(c21.296,8.743) 21.474,8.743 21.474,8.529 ccw(c21.652,8.529) 21.83,8.529 21.83,8.743 cw(c22.008,8.743) 22.185,8.743 22.185,8.529 ccw(c22.363,8.529) 22.541,8.529 22.541,8.743 cw(c22.719,8.743) 22.897,8.743 22.897,8.529 ccw(c23.074,8.529) 23.252,8.529 23.252,8.743 cw(c23.43,8.743) 23.608,8.743 23.608,8.496 ccw(c23.786,8.496) 23.963,8.496 23.963,8.743 cw(c24.141,8.743) 24.319,8.743 24.319,8.276 ccw(c24.497,8.276) 24.675,8.276 24.675,8.743 cw(c24.852,8.743) 25.03,8.743 25.03,7.92 ccw(c25.208,7.92) 25.386,7.92 25.386,8.743 cw(c25.564,8.743) 25.741,8.743 25.741,7.95 ccw(c25.919,7.95) 26.097,7.95 26.097,8.529 cw(c26.275,8.529) 26.453,8.529 ccw(c26.63,8.529) 26.63,8.352 27.511,8.352 27.865,8.352 27.925,8.292 27.925,4.098 27.278,3.452 27.278,3.016 27.695,2.6 27.695,1.985 U2.L3@28.08,1.6
DDR_MBA2: U1.101 U2.L1 | length 50.8
  Top Layer w0.102: U1.101@5.925,0.75 5.928,0.747 8.458,0.747 11.646,3.934 11.646,6.791 12.6,7.744 15.481,10.626 15.497,10.641 15.888,10.641 cw(c15.888,10.464) 16.066,10.464 16.066,10.289 ccw(c16.243,10.289) 16.421,10.289 16.421,10.503 cw(c16.599,10.503) 16.777,10.503 16.777,10.289 ccw(c16.955,10.289) 17.132,10.289 17.132,10.503 cw(c17.31,10.503) 17.488,10.503 17.488,10.289 ccw(c17.666,10.289) 17.844,10.289 17.844,10.503 cw(c18.021,10.503) 18.199,10.503 18.199,10.289 ccw(c18.377,10.289) 18.555,10.289 18.555,10.503 cw(c18.733,10.503) 18.91,10.503 18.91,10.289 ccw(c19.088,10.289) 19.266,10.289 19.266,10.503 cw(c19.444,10.503) 19.622,10.503 19.622,10.289 ccw(c19.799,10.289) 19.977,10.289 19.977,10.503 cw(c20.155,10.503) 20.333,10.503 20.333,10.289 ccw(c20.511,10.289) 20.688,10.289 20.688,10.503 cw(c20.866,10.503) 21.044,10.503 21.044,10.289 ccw(c21.222,10.289) 21.4,10.289 21.4,10.503 cw(c21.577,10.503) 21.755,10.503 21.755,10.289 ccw(c21.933,10.289) 22.111,10.289 22.111,10.503 cw(c22.289,10.503) 22.466,10.503 22.466,10.289 ccw(c22.644,10.289) 22.822,10.289 22.822,10.508 cw(c23,10.508) 23.178,10.508 23.178,10.289 ccw(c23.355,10.289) 23.533,10.289 23.533,10.508 cw(c23.711,10.508) 23.889,10.508 23.889,10.289 ccw(c24.067,10.289) 24.244,10.289 24.244,10.526 cw(c24.422,10.526) 24.6,10.526 24.6,10.289 ccw(c24.778,10.289) 24.956,10.289 24.956,10.526 cw(c25.133,10.526) 25.311,10.526 25.311,10.289 ccw(c25.489,10.289) 25.667,10.289 25.667,10.526 cw(c25.845,10.526) 26.022,10.526 26.022,10.289 ccw(c26.2,10.289) 26.378,10.289 26.378,10.526 cw(c26.556,10.526) 26.734,10.526 26.734,10.251 ccw(c26.911,10.251) 27.089,10.251 27.089,10.526 cw(c27.267,10.526) 27.445,10.526 27.445,10.066 ccw(c27.623,10.066) 27.8,10.066 27.8,10.464 cw(c27.978,10.464) 27.978,10.641 28.278,10.641 28.302,10.641 28.617,10.326 28.617,3.737 U2.L1@28.08,3.2
DDR_MCKE: U1.103 U2.K2 | length 50.8
  Top Layer w0.102: U1.103@5.925,1.25 8.315,1.25 11.189,4.124 11.189,7.263 12.407,8.481 15.734,11.808 16.059,11.808 16.11,11.808 ccw(c16.11,11.986) 16.288,11.986 16.288,12.139 cw(c16.466,12.139) 16.643,12.139 16.643,11.972 ccw(c16.821,11.972) 16.999,11.972 16.999,12.139 cw(c17.177,12.139) 17.355,12.139 17.355,11.972 ccw(c17.532,11.972) 17.71,11.972 17.71,12.139 cw(c17.888,12.139) 18.066,12.139 18.066,11.972 ccw(c18.244,11.972) 18.421,11.972 18.421,12.139 cw(c18.599,12.139) 18.777,12.139 18.777,11.972 ccw(c18.955,11.972) 19.133,11.972 19.133,12.139 cw(c19.31,12.139) 19.488,12.139 19.488,11.972 ccw(c19.666,11.972) 19.844,11.972 19.844,12.139 cw(c20.022,12.139) 20.199,12.139 20.199,11.972 ccw(c20.377,11.972) 20.555,11.972 20.555,12.139 cw(c20.733,12.139) 20.911,12.139 20.911,11.972 ccw(c21.088,11.972) 21.266,11.972 21.266,12.139 cw(c21.444,12.139) 21.622,12.139 21.622,11.972 ccw(c21.8,11.972) 21.977,11.972 21.977,12.139 cw(c22.155,12.139) 22.333,12.139 22.333,11.972 ccw(c22.511,11.972) 22.689,11.972 22.689,12.139 cw(c22.866,12.139) 23.044,12.139 23.044,11.972 ccw(c23.222,11.972) 23.4,11.972 23.4,12.139 cw(c23.578,12.139) 23.755,12.139 23.755,11.972 ccw(c23.933,11.972) 24.111,11.972 24.111,12.139 cw(c24.289,12.139) 24.467,12.139 24.467,11.972 ccw(c24.644,11.972) 24.822,11.972 24.822,12.139 cw(c25,12.139) 25.178,12.139 25.178,11.972 ccw(c25.356,11.972) 25.533,11.972 25.533,12.139 cw(c25.711,12.139) 25.889,12.139 25.889,11.972 ccw(c26.067,11.972) 26.245,11.972 26.245,12.139 cw(c26.422,12.139) 26.6,12.139 26.6,11.972 ccw(c26.778,11.972) 26.956,11.972 26.956,12.049 cw(c27.134,12.049) 27.311,12.049 27.311,11.931 ccw(c27.489,11.931) 27.667,11.931 27.667,11.986 cw(c27.845,11.986) 28.023,11.986 ccw(c28.2,11.986) 28.2,11.808 28.471,11.808 28.703,11.576 29.273,11.006 29.273,3.216 28.88,2.822 U2.K2@28.88,2.4
DDR_MDQM0: U1.108 U2.F3 | length 50.8
  Top Layer w0.102: U1.108@5.275,2.5 8.257,2.5 10.274,4.517 10.274,8.247 16.134,14.107 31.45,14.107 31.723,13.834 31.723,8.958 31.723,8.552 cw(c31.546,8.552) 31.546,8.374 31.364,8.374 ccw(c31.364,8.196) 31.364,8.018 31.597,8.018 cw(c31.597,7.841) 31.597,7.663 31.364,7.663 ccw(c31.364,7.485) 31.364,7.307 31.597,7.307 cw(c31.597,7.129) 31.597,6.952 31.364,6.952 ccw(c31.364,6.774) 31.364,6.596 31.597,6.596 cw(c31.597,6.418) 31.597,6.24 31.364,6.24 ccw(c31.364,6.063) 31.364,5.885 31.597,5.885 cw(c31.597,5.707) 31.597,5.529 31.4,5.529 ccw(c31.4,5.351) 31.4,5.174 31.597,5.174 cw(c31.597,4.996) 31.597,4.818 31.546,4.818 ccw(c31.546,4.64) 31.546,4.462 cw(c31.546,4.285) 31.723,4.285 31.723,3.29 31.686,3.254 31.686,1.733 31.746,1.674 31.871,1.674 31.888,1.657 32.023,1.657 U2.F3@32.08,1.6
DDR_MDQM1: U1.64 U2.B3 | length 49.7
  Top Layer w0.102: U1.64@1.25,-5.925 1.25,-4.785 2.027,-4.008 3.573,-4.008 v1(4.59,-2.991) ; v1(28.765,0.497) 35.22,0.497 35.28,0.556 U2.B3@35.28,1.6
  Bottom Layer w0.102: v1(4.59,-2.991) 6.871,-2.991 10.334,0.473 10.507,0.645 10.652,0.645 cw(c10.652,0.467) 10.829,0.467 10.829,0.386 ccw(c11.007,0.386) 11.185,0.386 11.185,0.682 cw(c11.363,0.682) 11.541,0.682 11.541,0.386 ccw(c11.718,0.386) 11.896,0.386 11.896,0.682 cw(c12.074,0.682) 12.252,0.682 12.252,0.386 ccw(c12.43,0.386) 12.607,0.386 12.607,0.682 cw(c12.785,0.682) 12.963,0.682 12.963,0.386 ccw(c13.141,0.386) 13.319,0.386 13.319,0.682 cw(c13.496,0.682) 13.674,0.682 13.674,0.386 ccw(c13.852,0.386) 14.03,0.386 14.03,0.682 cw(c14.208,0.682) 14.385,0.682 14.385,0.386 ccw(c14.563,0.386) 14.741,0.386 14.741,0.676 cw(c14.919,0.676) 15.097,0.676 15.097,0.386 ccw(c15.274,0.386) 15.452,0.386 15.452,0.639 cw(c15.63,0.639) 15.808,0.639 15.808,0.386 ccw(c15.986,0.386) 16.163,0.386 16.163,0.639 cw(c16.341,0.639) 16.519,0.639 16.519,0.386 ccw(c16.697,0.386) 16.875,0.386 16.875,0.639 cw(c17.052,0.639) 17.23,0.639 17.23,0.386 ccw(c17.408,0.386) 17.586,0.386 17.586,0.639 cw(c17.764,0.639) 17.941,0.639 17.941,0.517 ccw(c18.119,0.517) 18.297,0.517 18.297,0.639 cw(c18.475,0.639) 18.653,0.639 ccw(c18.83,0.639) 19.008,0.639 cw(c19.186,0.639) 19.364,0.639 19.364,0.467 ccw(c19.542,0.467) 19.719,0.467 cw(c19.897,0.467) 19.897,0.645 21.054,0.645 21.098,0.688 28.489,0.688 28.68,0.497 v1(28.765,0.497)
DDR_MDQS0: U1.113 U2.F7 | length 50.6
  Top Layer w0.102: v1(4.618,2.14) 4.562,2.196 4.562,3.69 4.621,3.75 U1.113@5.925,3.75 ; v1@31.709,-1.974 31.709,-1.972 32.08,-1.601 U2.F7@32.08,-1.6
  Bottom Layer w0.102: v1(4.618,2.14) 6.225,2.14 7.201,1.165 10.61,1.165 14.614,1.165 ccw(c14.614,1.342) 14.792,1.342 cw(c14.969,1.342) 15.147,1.342 15.147,1.295 ccw(c15.325,1.295) 15.503,1.295 15.503,1.564 cw(c15.681,1.564) 15.858,1.564 15.858,1.295 ccw(c16.036,1.295) 16.214,1.295 16.214,1.577 cw(c16.392,1.577) 16.57,1.577 16.57,1.295 ccw(c16.747,1.295) 16.925,1.295 16.925,1.577 cw(c17.103,1.577) 17.281,1.577 17.281,1.295 ccw(c17.459,1.295) 17.636,1.295 17.636,1.577 cw(c17.814,1.577) 17.992,1.577 17.992,1.295 ccw(c18.17,1.295) 18.348,1.295 18.348,1.577 cw(c18.525,1.577) 18.703,1.577 18.703,1.295 ccw(c18.881,1.295) 19.059,1.295 19.059,1.577 cw(c19.237,1.577) 19.414,1.577 19.414,1.295 ccw(c19.592,1.295) 19.77,1.295 19.77,1.577 cw(c19.948,1.577) 20.126,1.577 20.126,1.295 ccw(c20.303,1.295) 20.481,1.295 20.481,1.577 cw(c20.659,1.577) 20.837,1.577 20.837,1.295 ccw(c21.015,1.295) 21.192,1.295 21.192,1.577 cw(c21.37,1.577) 21.548,1.577 21.548,1.295 ccw(c21.726,1.295) 21.904,1.295 21.904,1.577 cw(c22.081,1.577) 22.259,1.577 22.259,1.295 ccw(c22.437,1.295) 22.615,1.295 22.615,1.577 cw(c22.793,1.577) 22.97,1.577 22.97,1.295 ccw(c23.148,1.295) 23.326,1.295 23.326,1.577 cw(c23.504,1.577) 23.682,1.577 23.682,1.295 ccw(c23.859,1.295) 24.037,1.295 24.037,1.577 cw(c24.215,1.577) 24.393,1.577 24.393,1.295 ccw(c24.571,1.295) 24.748,1.295 24.748,1.577 cw(c24.926,1.577) 25.104,1.577 25.104,1.295 ccw(c25.282,1.295) 25.46,1.295 25.46,1.577 cw(c25.637,1.577) 25.815,1.577 25.815,1.295 ccw(c25.993,1.295) 26.171,1.295 26.171,1.577 cw(c26.349,1.577) 26.526,1.577 26.526,1.295 ccw(c26.704,1.295) 26.882,1.295 26.882,1.577 cw(c27.06,1.577) 27.238,1.577 27.238,1.295 ccw(c27.415,1.295) 27.593,1.295 27.593,1.577 cw(c27.771,1.577) 27.949,1.577 27.949,1.342 ccw(c28.127,1.342) 28.127,1.165 28.533,1.165 29.273,1.165 31.702,-1.264 v1(31.702,-1.981)
DDR_MDQS1: U1.72 U2.B7 | length 49.7
  Top Layer w0.102: v1(3.246,-4.691) 3.25,-4.695 U1.72@3.25,-5.925 ; v1(28.922,-0.121) 29.009,-0.121 29.156,0.025 34.914,0.025 35.28,-0.341 U2.B7@35.28,-1.6
  Bottom Layer w0.102: v1(3.246,-4.691) 4.472,-3.466 6.944,-3.466 10.314,-0.097 13.645,-0.097 17.608,-0.097 cw(c17.608,-0.274) 17.786,-0.274 17.786,-0.328 ccw(c17.963,-0.328) 18.141,-0.328 18.141,-0.199 cw(c18.319,-0.199) 18.497,-0.199 18.497,-0.328 ccw(c18.675,-0.328) 18.852,-0.328 18.852,-0.199 cw(c19.03,-0.199) 19.208,-0.199 19.208,-0.328 ccw(c19.386,-0.328) 19.564,-0.328 19.564,-0.199 cw(c19.741,-0.199) 19.919,-0.199 19.919,-0.328 ccw(c20.097,-0.328) 20.275,-0.328 20.275,-0.059 cw(c20.453,-0.059) 20.63,-0.059 20.63,-0.328 ccw(c20.808,-0.328) 20.986,-0.328 20.986,-0.059 cw(c21.164,-0.059) 21.342,-0.059 21.342,-0.328 ccw(c21.519,-0.328) 21.697,-0.328 21.697,-0.059 cw(c21.875,-0.059) 22.053,-0.059 22.053,-0.363 ccw(c22.231,-0.363) 22.408,-0.363 22.408,-0.059 cw(c22.586,-0.059) 22.764,-0.059 22.764,-0.363 ccw(c22.942,-0.363) 23.12,-0.363 23.12,-0.059 cw(c23.297,-0.059) 23.475,-0.059 23.475,-0.363 ccw(c23.653,-0.363) 23.831,-0.363 23.831,-0.059 cw(c24.009,-0.059) 24.186,-0.059 24.186,-0.363 ccw(c24.364,-0.363) 24.542,-0.363 24.542,-0.059 cw(c24.72,-0.059) 24.898,-0.059 24.898,-0.363 ccw(c25.075,-0.363) 25.253,-0.363 25.253,-0.059 cw(c25.431,-0.059) 25.609,-0.059 25.609,-0.363 ccw(c25.787,-0.363) 25.964,-0.363 25.964,-0.059 cw(c26.142,-0.059) 26.32,-0.059 26.32,-0.363 ccw(c26.498,-0.363) 26.676,-0.363 26.676,-0.059 cw(c26.853,-0.059) 27.031,-0.059 27.031,-0.24 ccw(c27.209,-0.24) 27.387,-0.24 27.387,-0.096 cw(c27.565,-0.096) 27.742,-0.096 27.742,-0.274 ccw(c27.92,-0.274) 28.098,-0.274 cw(c28.276,-0.274) 28.276,-0.097 28.594,-0.097 28.898,-0.097 v1(28.922,-0.121)
DDR_MODT: R14.2 R15.1 U1.74 U2.K9 | length 33
  Top Layer w0.102: U1.74@3.75,-5.925 3.75,-8.142 5.229,-9.622 26.516,-9.622 28.915,-7.222 28.915,-3.235 U2.K9@28.88,-3.2
DDR_RASN: U1.81 U2.K7 | length 30.6
  Top Layer w0.102: U1.81@5.958,-4.25 7.455,-4.25 7.695,-4.489 7.695,-4.916 7.913,-5.135 7.913,-6.388 7.998,-6.473 ; 7.998,-6.473 ccw(c8.07,-6.401) 8.07,-6.502 18.019,-6.502 18.417,-6.9 24.695,-6.9 25.469,-6.126 25.469,-4.362 26.449,-3.382 26.449,-2.929 26.832,-2.546 26.832,-2.349 27.134,-2.048 27.421,-2.048 27.691,-1.777 27.691,-0.716 27.842,-0.565 28.735,-0.565 28.88,-0.71 28.88,-1.562 U2.K7@28.91,-1.593
DDR_VREF: C29.1 C30.1 C58.2 C59.1 R16.2 R17.1 U1.90 U1.104 U2.J2 | length 40.2
  Top Layer w0.254: v1@4.745,-2 U1.90@5.275,-2 ; v1@4.745,1.5 U1.104@5.275,1.5
  Top Layer w0.356: v1@29.373,2.091 U2.J2@29.68,2.4
  Top Layer w0.406: v1(29.373,2.09) v1@29.373,2.091 ; U2.J2@29.68,2.4 U2.J2@29.68,2.4
  Bottom Layer w0.406: v1(4.743,-1.998) 5.237,-1.503 5.237,0.996 4.743,1.49 v1(4.743,1.502) 4.143,1.502 3.905,1.74 3.905,2.583 4.143,2.821 25.301,2.821 26.751,4.271 27.207,4.271 27.258,4.322 R17.1@27.258,4.397 27.258,4.351 27.309,4.3 28.535,4.3 28.586,4.351 C59.1@28.586,4.388 ; C30.1@27.837,3.025 27.843,3.019 28.58,3.019 ; 28.564,3.011 28.586,3.011 ; C29.1@29.251,2.986 29.225,3.011 28.586,3.011 ; v1(29.373,2.09) 28.824,2.09 28.586,2.328 28.586,3.011 ; R16.2@31.382,4.397 31.382,4.351 31.331,4.3 30.003,4.3 29.953,4.351 C58.2@29.953,4.388 29.953,4.378 29.902,4.327 28.637,4.327 28.586,4.378 C59.1@28.586,4.388 ; 28.586,3.011 C59.1@28.586,4.388
DDR_WEN: U1.102 U2.K3 | length 50.8
  Top Layer w0.102: U1.102@5.275,1 8.388,1 11.417,4.029 11.417,6.999 15.439,11.021 15.733,11.021 15.784,11.021 ccw(c15.784,11.199) 15.961,11.199 15.961,11.312 cw(c16.139,11.312) 16.317,11.312 16.317,11.163 ccw(c16.495,11.163) 16.673,11.163 16.673,11.312 cw(c16.85,11.312) 17.028,11.312 17.028,11.163 ccw(c17.206,11.163) 17.384,11.163 17.384,11.312 cw(c17.562,11.312) 17.739,11.312 17.739,11.163 ccw(c17.917,11.163) 18.095,11.163 18.095,11.312 cw(c18.273,11.312) 18.451,11.312 18.451,11.163 ccw(c18.628,11.163) 18.806,11.163 18.806,11.312 cw(c18.984,11.312) 19.162,11.312 19.162,11.163 ccw(c19.34,11.163) 19.517,11.163 19.517,11.312 cw(c19.695,11.312) 19.873,11.312 19.873,11.163 ccw(c20.051,11.163) 20.229,11.163 20.229,11.312 cw(c20.406,11.312) 20.584,11.312 20.584,11.163 ccw(c20.762,11.163) 20.94,11.163 20.94,11.312 cw(c21.118,11.312) 21.295,11.312 21.295,11.163 ccw(c21.473,11.163) 21.651,11.163 21.651,11.312 cw(c21.829,11.312) 22.007,11.312 22.007,11.163 ccw(c22.184,11.163) 22.362,11.163 22.362,11.312 cw(c22.54,11.312) 22.718,11.312 22.718,11.168 ccw(c22.896,11.168) 23.073,11.168 23.073,11.312 cw(c23.251,11.312) 23.429,11.312 23.429,11.168 ccw(c23.607,11.168) 23.785,11.168 23.785,11.312 cw(c23.962,11.312) 24.14,11.312 24.14,11.187 ccw(c24.318,11.187) 24.496,11.187 24.496,11.312 cw(c24.674,11.312) 24.851,11.312 24.851,11.187 ccw(c25.029,11.187) 25.207,11.187 25.207,11.312 cw(c25.385,11.312) 25.563,11.312 25.563,11.187 ccw(c25.74,11.187) 25.918,11.187 25.918,11.312 cw(c26.096,11.312) 26.274,11.312 26.274,11.187 ccw(c26.452,11.187) 26.629,11.187 26.629,11.312 cw(c26.807,11.312) 26.985,11.312 26.985,11.187 ccw(c27.163,11.187) 27.341,11.187 27.341,11.271 cw(c27.518,11.271) 27.696,11.271 27.696,11.199 ccw(c27.874,11.199) 27.874,11.021 28.764,11.021 28.811,11.021 28.967,10.865 28.967,3.365 28.5,2.898 28.5,1.98 U2.K3@28.88,1.6
EPH_LED0_N: U1.143
EPH_LED1_N: U1.142